# EAGLE board atmega32u4-breakout-v2-panelized (EAGLE 5.10), part 1 of 2
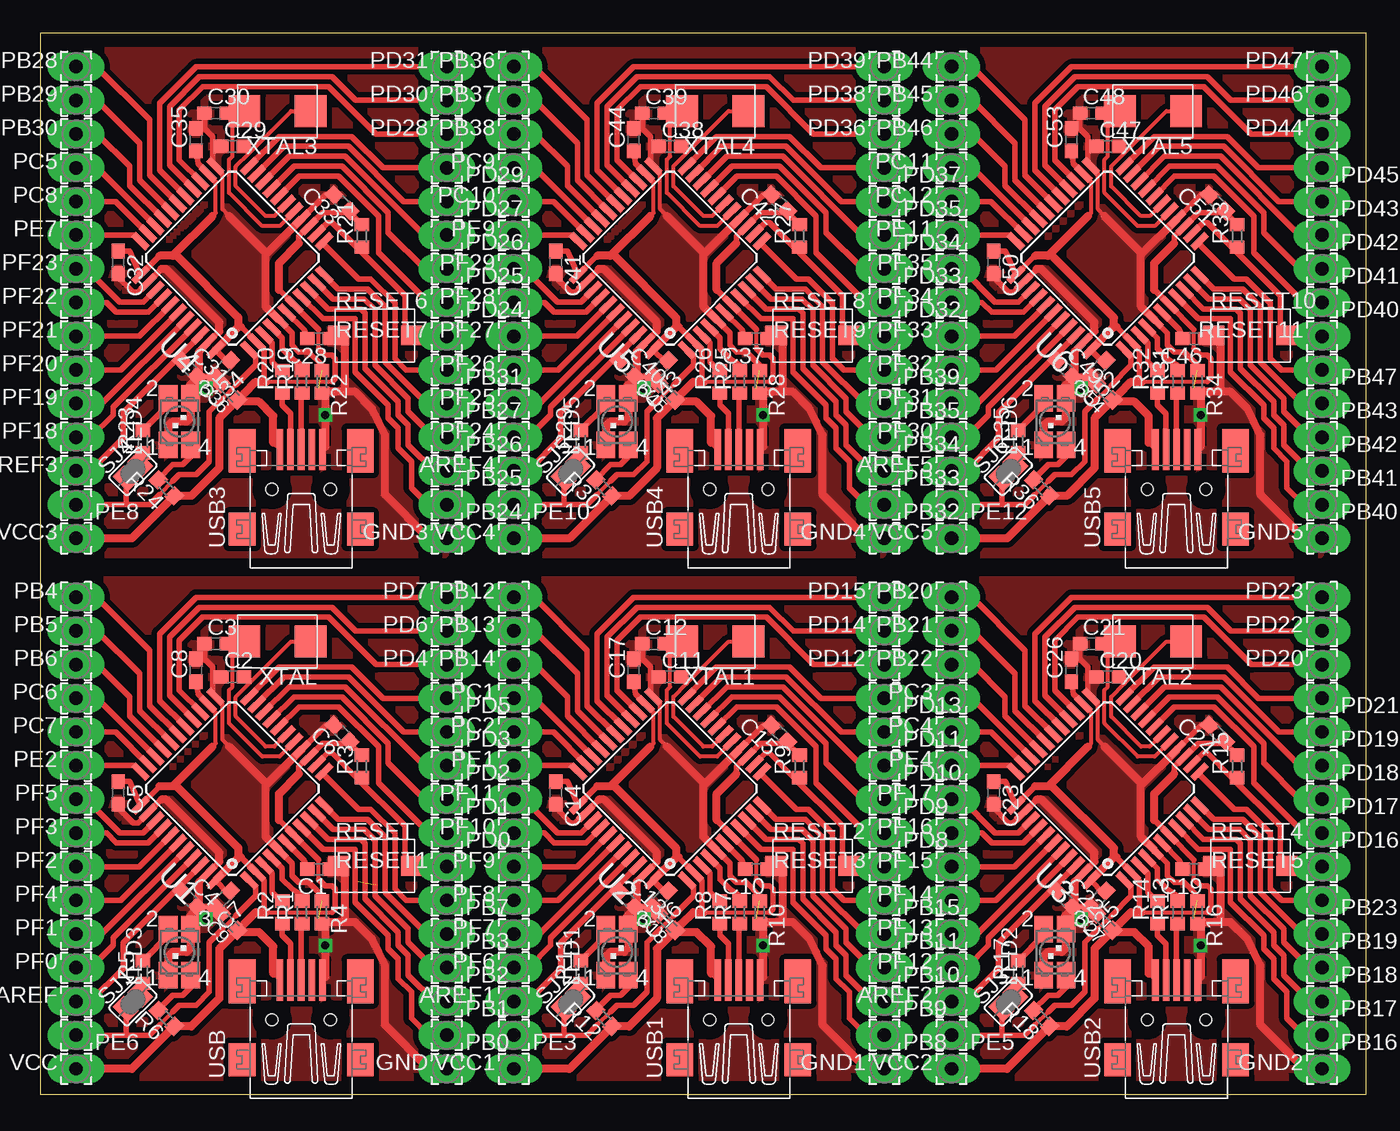
[diagram p0: board, top side]
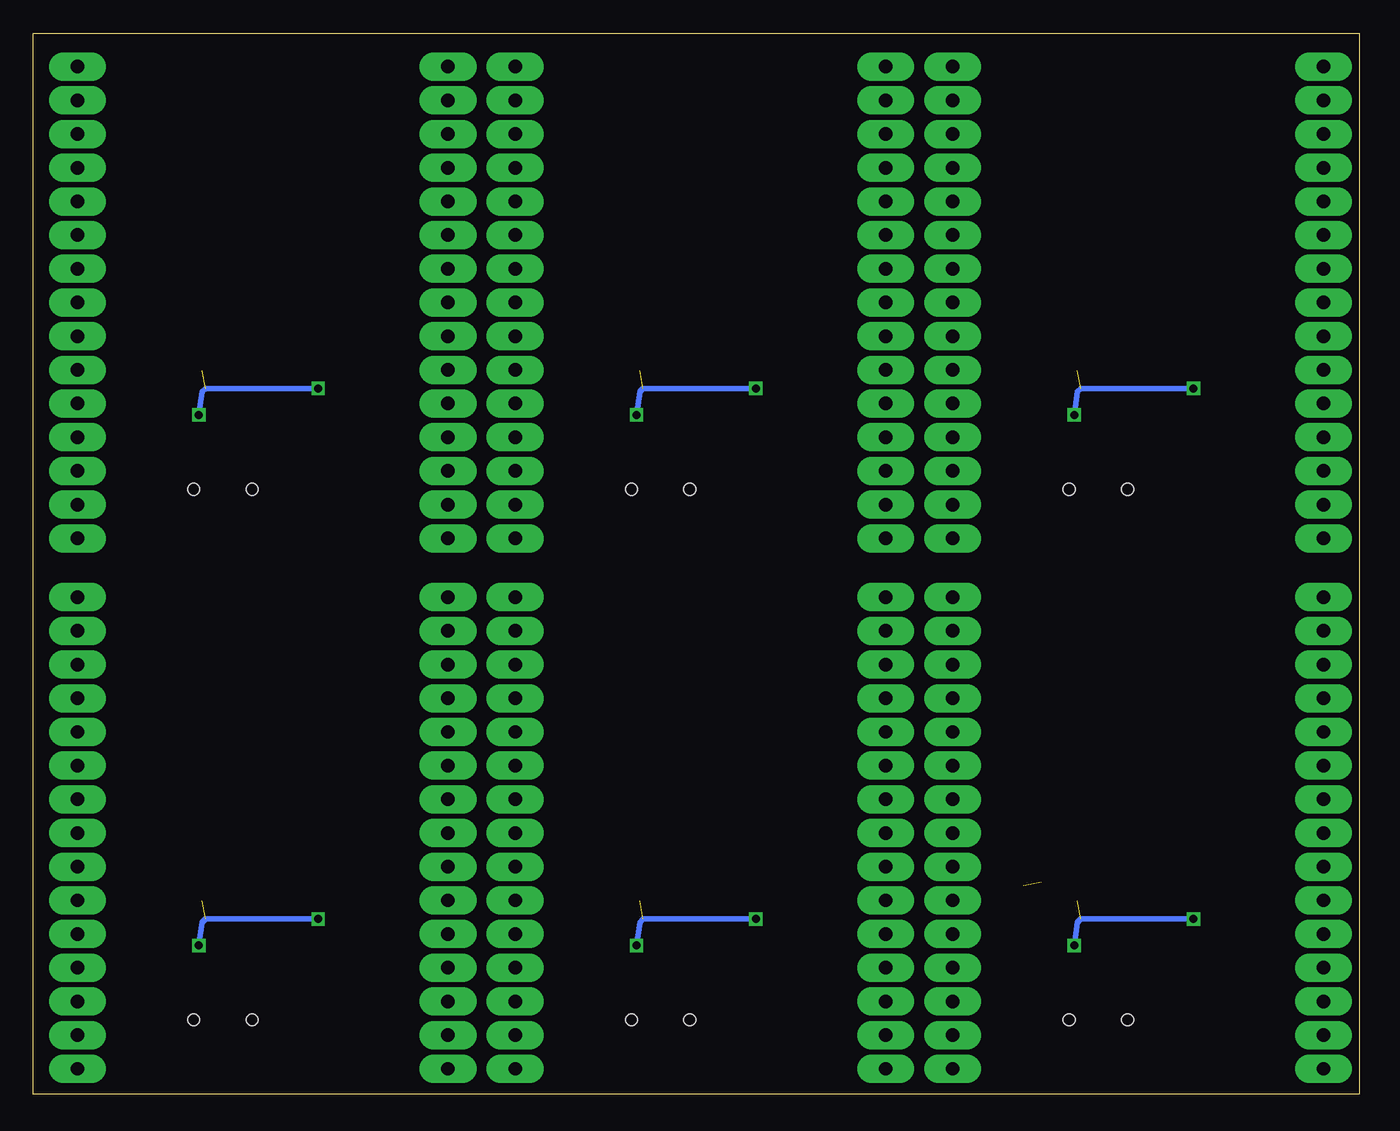
[diagram p1: board, bottom side, seen from below]

Size 100 x 80 mm. Coordinates in mm from the lower left corner, seen from the top.
Outline: 0,0 100,0 100,80 0,80 0,0
Copper layers (1*16): Top 0.035mm / dielectric 1.5mm / Bottom 0.035mm
Design rules "default *": minimum track width 10mil, minimum drill 24mil, track to track 8mil, track to pad 8mil, pad to pad 8mil, via to via 8mil, smd to smd 8mil, copper to edge 40mil, drill to drill 8mil, minimum pad ring 10mil, minimum via ring 8mil, stop-mask expansion 4mil, vias tented up to drill 0mil, thermal gap 16mil

## Footprints (pad centres in the part's own frame; a part is rotated, then mirrored left to right if it is on the bottom)
2,15Y/1,0 = drill 1.016 pad 2.159 long: 1 0,0
C0603 = smd 1.1 x 1: 1 -0.85,0; 2 0.85,0
C0603K = smd 1.05 x 1.08: 1 -0.875,0; 2 0.875,0
P-LCC-4/2 = smd 1.4 x 2: 1 -0.85,-1.75; 2 -0.85,1.75; 3 0.85,1.75; 4 0.85,-1.75
R0603 = smd 1 x 1.1: 1 -0.85,0; 2 0.85,0
SWSMD4X6 = smd 1.6 x 1.5: P$1 -2.75,0; P$2 2.75,0
SJ = smd 1.168 x 1.6: 1 -0.762,0; 2 0.762,0
TQFP44 = smd 1.5 x 0.5: 1 -5.8,4; 2 -5.8,3.2; 3 -5.8,2.4; 4 -5.8,1.6; 5 -5.8,0.8; 6 -5.8,0; 7 -5.8,-0.8; 8 -5.8,-1.6; 9 -5.8,-2.4; 10 -5.8,-3.2; 11 -5.8,-4; 23 5.8,-4; 24 5.8,-3.2; 25 5.8,-2.4; 26 5.8,-1.6; 27 5.8,-0.8; 28 5.8,0; 29 5.8,0.8; 30 5.8,1.6; 31 5.8,2.4; 32 5.8,3.2; 33 5.8,4 | smd 0.5 x 1.5: 12 -4,-5.8; 13 -3.2,-5.8; 14 -2.4,-5.8; 15 -1.6,-5.8; 16 -0.8,-5.8; 17 0,-5.8; 18 0.8,-5.8; 19 1.6,-5.8; 20 2.4,-5.8; 21 3.2,-5.8; 22 4,-5.8; 34 4,5.8; 35 3.2,5.8; 36 2.4,5.8; 37 1.6,5.8; 38 0.8,5.8; 39 0,5.8; 40 -0.8,5.8; 41 -1.6,5.8; 42 -2.4,5.8; 43 -3.2,5.8; 44 -4,5.8
32005-301 = smd 3.1 x 0.5: 1 3,1.6; 2 3,0.8; 3 3,0; 4 3,-0.8; 5 3,-1.6 | smd 2.5 x 2: M1 -3,-4.45; M2 -3,4.45 | smd 3.3 x 2: M3 2.9,4.45; M4 2.9,-4.45 | drill 0.127 pad 0.508 round: P$1 0,2.21; P$2 0,-2.21 | hole 0.9: 0,2.2; 0,-2.2
CS10 = smd 2.4 x 2.4: P$1 -2.5,0; P$2 2.5,0

## Placement (x,y rotation side)
AREF  WIREPAD2,15Y/1,0  [2,15Y/1,0]  2.72,6.99 180 top
AREF1  WIREPAD2,15Y/1,0  [2,15Y/1,0]  35.72,6.99 180 top
AREF2  WIREPAD2,15Y/1,0  [2,15Y/1,0]  68.72,6.99 180 top
AREF3  WIREPAD2,15Y/1,0  [2,15Y/1,0]  2.72,46.99 180 top
AREF4  WIREPAD2,15Y/1,0  [2,15Y/1,0]  35.72,46.99 180 top
AREF5  WIREPAD2,15Y/1,0  [2,15Y/1,0]  68.72,46.99 180 top
C1  1u  [C0603]  21.01,16.96 180 top
C2  18p  [C0603]  14.51,31.46 0 top
C3  18p  [C0603]  13.26,33.96 0 top
C4  100n  [C0603]  11.26,14.71 315 top
C5  100n  [C0603]  5.89,22.71 270 top
C6  100n  [C0603]  22.76,27.21 135 top
C7  100n  [C0603]  13.76,14.71 225 top
C8  100n  [C0603]  11.76,31.96 90 top
C9  1u  [C0603K]  14.26,12.96 135 top
C10  1u  [C0603]  54.01,16.96 180 top
C11  18p  [C0603]  47.51,31.46 0 top
C12  18p  [C0603]  46.26,33.96 0 top
C13  100n  [C0603]  44.26,14.71 315 top
C14  100n  [C0603]  38.89,22.71 270 top
C15  100n  [C0603]  55.76,27.21 135 top
C16  100n  [C0603]  46.76,14.71 225 top
C17  100n  [C0603]  44.76,31.96 90 top
C18  1u  [C0603K]  47.26,12.96 135 top
C19  1u  [C0603]  87.01,16.96 180 top
C20  18p  [C0603]  80.51,31.46 0 top
C21  18p  [C0603]  79.26,33.96 0 top
C22  100n  [C0603]  77.26,14.71 315 top
C23  100n  [C0603]  71.89,22.71 270 top
C24  100n  [C0603]  88.76,27.21 135 top
C25  100n  [C0603]  79.76,14.71 225 top
C26  100n  [C0603]  77.76,31.96 90 top
C27  1u  [C0603K]  80.26,12.96 135 top
C28  1u  [C0603]  21.01,56.96 180 top
C29  18p  [C0603]  14.51,71.46 0 top
C30  18p  [C0603]  13.26,73.96 0 top
C31  100n  [C0603]  11.26,54.71 315 top
C32  100n  [C0603]  5.89,62.72 270 top
C33  100n  [C0603]  22.76,67.21 135 top
C34  100n  [C0603]  13.76,54.71 225 top
C35  100n  [C0603]  11.76,71.96 90 top
C36  1u  [C0603K]  14.26,52.96 135 top
C37  1u  [C0603]  54.01,56.96 180 top
C38  18p  [C0603]  47.51,71.46 0 top
C39  18p  [C0603]  46.26,73.96 0 top
C40  100n  [C0603]  44.26,54.71 315 top
C41  100n  [C0603]  38.89,62.72 270 top
C42  100n  [C0603]  55.76,67.21 135 top
C43  100n  [C0603]  46.76,54.71 225 top
C44  100n  [C0603]  44.76,71.96 90 top
C45  1u  [C0603K]  47.26,52.96 135 top
C46  1u  [C0603]  87.01,56.96 180 top
C47  18p  [C0603]  80.51,71.46 0 top
C48  18p  [C0603]  79.26,73.96 0 top
C49  100n  [C0603]  77.26,54.71 315 top
C50  100n  [C0603]  71.89,62.72 270 top
C51  100n  [C0603]  88.76,67.21 135 top
C52  100n  [C0603]  79.76,54.71 225 top
C53  100n  [C0603]  77.76,71.96 90 top
C54  1u  [C0603K]  80.26,52.96 135 top
GND  WIREPAD2,15Y/1,0  [2,15Y/1,0]  30.66,1.91 180 top
GND1  WIREPAD2,15Y/1,0  [2,15Y/1,0]  63.66,1.91 180 top
GND2  WIREPAD2,15Y/1,0  [2,15Y/1,0]  96.66,1.91 180 top
GND3  WIREPAD2,15Y/1,0  [2,15Y/1,0]  30.66,41.91 180 top
GND4  WIREPAD2,15Y/1,0  [2,15Y/1,0]  63.66,41.91 180 top
GND5  WIREPAD2,15Y/1,0  [2,15Y/1,0]  96.66,41.91 180 top
LED1  [P-LCC-4/2]  43.51,10.71 0 top
LED2  [P-LCC-4/2]  76.51,10.71 0 top
LED3  [P-LCC-4/2]  10.51,10.71 0 top
LED4  [P-LCC-4/2]  10.51,50.71 0 top
LED5  [P-LCC-4/2]  43.51,50.71 0 top
LED6  [P-LCC-4/2]  76.51,50.71 0 top
PB0  WIREPAD2,15Y/1,0  [2,15Y/1,0]  30.66,4.45 0 top
PB1  WIREPAD2,15Y/1,0  [2,15Y/1,0]  30.66,6.99 0 top
PB2  WIREPAD2,15Y/1,0  [2,15Y/1,0]  30.66,9.53 0 top
PB3  WIREPAD2,15Y/1,0  [2,15Y/1,0]  30.66,12.07 0 top
PB4  WIREPAD2,15Y/1,0  [2,15Y/1,0]  2.72,37.47 180 top
PB5  WIREPAD2,15Y/1,0  [2,15Y/1,0]  2.72,34.93 180 top
PB6  WIREPAD2,15Y/1,0  [2,15Y/1,0]  2.72,32.39 180 top
PB7  WIREPAD2,15Y/1,0  [2,15Y/1,0]  30.66,14.61 0 top
PB8  WIREPAD2,15Y/1,0  [2,15Y/1,0]  63.66,4.45 0 top
PB9  WIREPAD2,15Y/1,0  [2,15Y/1,0]  63.66,6.99 0 top
PB10  WIREPAD2,15Y/1,0  [2,15Y/1,0]  63.66,9.53 0 top
PB11  WIREPAD2,15Y/1,0  [2,15Y/1,0]  63.66,12.07 0 top
PB12  WIREPAD2,15Y/1,0  [2,15Y/1,0]  35.72,37.47 180 top
PB13  WIREPAD2,15Y/1,0  [2,15Y/1,0]  35.72,34.93 180 top
PB14  WIREPAD2,15Y/1,0  [2,15Y/1,0]  35.72,32.39 180 top
PB15  WIREPAD2,15Y/1,0  [2,15Y/1,0]  63.66,14.61 0 top
PB16  WIREPAD2,15Y/1,0  [2,15Y/1,0]  96.66,4.45 0 top
PB17  WIREPAD2,15Y/1,0  [2,15Y/1,0]  96.66,6.99 0 top
PB18  WIREPAD2,15Y/1,0  [2,15Y/1,0]  96.66,9.53 0 top
PB19  WIREPAD2,15Y/1,0  [2,15Y/1,0]  96.66,12.07 0 top
PB20  WIREPAD2,15Y/1,0  [2,15Y/1,0]  68.72,37.47 180 top
PB21  WIREPAD2,15Y/1,0  [2,15Y/1,0]  68.72,34.93 180 top
PB22  WIREPAD2,15Y/1,0  [2,15Y/1,0]  68.72,32.39 180 top
PB23  WIREPAD2,15Y/1,0  [2,15Y/1,0]  96.66,14.61 0 top
PB24  WIREPAD2,15Y/1,0  [2,15Y/1,0]  30.66,44.45 0 top
PB25  WIREPAD2,15Y/1,0  [2,15Y/1,0]  30.66,46.99 0 top
PB26  WIREPAD2,15Y/1,0  [2,15Y/1,0]  30.66,49.53 0 top
PB27  WIREPAD2,15Y/1,0  [2,15Y/1,0]  30.66,52.07 0 top
PB28  WIREPAD2,15Y/1,0  [2,15Y/1,0]  2.72,77.47 180 top
PB29  WIREPAD2,15Y/1,0  [2,15Y/1,0]  2.72,74.93 180 top
PB30  WIREPAD2,15Y/1,0  [2,15Y/1,0]  2.72,72.39 180 top
PB31  WIREPAD2,15Y/1,0  [2,15Y/1,0]  30.66,54.61 0 top
PB32  WIREPAD2,15Y/1,0  [2,15Y/1,0]  63.66,44.45 0 top
PB33  WIREPAD2,15Y/1,0  [2,15Y/1,0]  63.66,46.99 0 top
PB34  WIREPAD2,15Y/1,0  [2,15Y/1,0]  63.66,49.53 0 top
PB35  WIREPAD2,15Y/1,0  [2,15Y/1,0]  63.66,52.07 0 top
PB36  WIREPAD2,15Y/1,0  [2,15Y/1,0]  35.72,77.47 180 top
PB37  WIREPAD2,15Y/1,0  [2,15Y/1,0]  35.72,74.93 180 top
PB38  WIREPAD2,15Y/1,0  [2,15Y/1,0]  35.72,72.39 180 top
PB39  WIREPAD2,15Y/1,0  [2,15Y/1,0]  63.66,54.61 0 top
PB40  WIREPAD2,15Y/1,0  [2,15Y/1,0]  96.66,44.45 0 top
PB41  WIREPAD2,15Y/1,0  [2,15Y/1,0]  96.66,46.99 0 top
PB42  WIREPAD2,15Y/1,0  [2,15Y/1,0]  96.66,49.53 0 top
PB43  WIREPAD2,15Y/1,0  [2,15Y/1,0]  96.66,52.07 0 top
PB44  WIREPAD2,15Y/1,0  [2,15Y/1,0]  68.72,77.47 180 top
PB45  WIREPAD2,15Y/1,0  [2,15Y/1,0]  68.72,74.93 180 top
PB46  WIREPAD2,15Y/1,0  [2,15Y/1,0]  68.72,72.39 180 top
PB47  WIREPAD2,15Y/1,0  [2,15Y/1,0]  96.66,54.61 0 top
PC1  WIREPAD2,15Y/1,0  [2,15Y/1,0]  35.72,29.85 180 top
PC2  WIREPAD2,15Y/1,0  [2,15Y/1,0]  35.72,27.31 180 top
PC3  WIREPAD2,15Y/1,0  [2,15Y/1,0]  68.72,29.85 180 top
PC4  WIREPAD2,15Y/1,0  [2,15Y/1,0]  68.72,27.31 180 top
PC5  WIREPAD2,15Y/1,0  [2,15Y/1,0]  2.72,69.85 180 top
PC6  WIREPAD2,15Y/1,0  [2,15Y/1,0]  2.72,29.85 180 top
PC7  WIREPAD2,15Y/1,0  [2,15Y/1,0]  2.72,27.31 180 top
PC8  WIREPAD2,15Y/1,0  [2,15Y/1,0]  2.72,67.31 180 top
PC9  WIREPAD2,15Y/1,0  [2,15Y/1,0]  35.72,69.85 180 top
PC10  WIREPAD2,15Y/1,0  [2,15Y/1,0]  35.72,67.31 180 top
PC11  WIREPAD2,15Y/1,0  [2,15Y/1,0]  68.72,69.85 180 top
PC12  WIREPAD2,15Y/1,0  [2,15Y/1,0]  68.72,67.31 180 top
PD0  WIREPAD2,15Y/1,0  [2,15Y/1,0]  30.66,19.69 0 top
PD1  WIREPAD2,15Y/1,0  [2,15Y/1,0]  30.66,22.23 0 top
PD2  WIREPAD2,15Y/1,0  [2,15Y/1,0]  30.66,24.77 0 top
PD3  WIREPAD2,15Y/1,0  [2,15Y/1,0]  30.66,27.31 0 top
PD4  WIREPAD2,15Y/1,0  [2,15Y/1,0]  30.66,32.39 180 top
PD5  WIREPAD2,15Y/1,0  [2,15Y/1,0]  30.66,29.85 0 top
PD6  WIREPAD2,15Y/1,0  [2,15Y/1,0]  30.66,34.93 180 top
PD7  WIREPAD2,15Y/1,0  [2,15Y/1,0]  30.66,37.47 180 top
PD8  WIREPAD2,15Y/1,0  [2,15Y/1,0]  63.66,19.69 0 top
PD9  WIREPAD2,15Y/1,0  [2,15Y/1,0]  63.66,22.23 0 top
PD10  WIREPAD2,15Y/1,0  [2,15Y/1,0]  63.66,24.77 0 top
PD11  WIREPAD2,15Y/1,0  [2,15Y/1,0]  63.66,27.31 0 top
PD12  WIREPAD2,15Y/1,0  [2,15Y/1,0]  63.66,32.39 180 top
PD13  WIREPAD2,15Y/1,0  [2,15Y/1,0]  63.66,29.85 0 top
PD14  WIREPAD2,15Y/1,0  [2,15Y/1,0]  63.66,34.93 180 top
PD15  WIREPAD2,15Y/1,0  [2,15Y/1,0]  63.66,37.47 180 top
PD16  WIREPAD2,15Y/1,0  [2,15Y/1,0]  96.66,19.69 0 top
PD17  WIREPAD2,15Y/1,0  [2,15Y/1,0]  96.66,22.23 0 top
PD18  WIREPAD2,15Y/1,0  [2,15Y/1,0]  96.66,24.77 0 top
PD19  WIREPAD2,15Y/1,0  [2,15Y/1,0]  96.66,27.31 0 top
PD20  WIREPAD2,15Y/1,0  [2,15Y/1,0]  96.66,32.39 180 top
PD21  WIREPAD2,15Y/1,0  [2,15Y/1,0]  96.66,29.85 0 top
PD22  WIREPAD2,15Y/1,0  [2,15Y/1,0]  96.66,34.93 180 top
PD23  WIREPAD2,15Y/1,0  [2,15Y/1,0]  96.66,37.47 180 top
PD24  WIREPAD2,15Y/1,0  [2,15Y/1,0]  30.66,59.69 0 top
PD25  WIREPAD2,15Y/1,0  [2,15Y/1,0]  30.66,62.23 0 top
PD26  WIREPAD2,15Y/1,0  [2,15Y/1,0]  30.66,64.77 0 top
PD27  WIREPAD2,15Y/1,0  [2,15Y/1,0]  30.66,67.31 0 top
PD28  WIREPAD2,15Y/1,0  [2,15Y/1,0]  30.66,72.39 180 top
PD29  WIREPAD2,15Y/1,0  [2,15Y/1,0]  30.66,69.85 0 top
PD30  WIREPAD2,15Y/1,0  [2,15Y/1,0]  30.66,74.93 180 top
PD31  WIREPAD2,15Y/1,0  [2,15Y/1,0]  30.66,77.47 180 top
PD32  WIREPAD2,15Y/1,0  [2,15Y/1,0]  63.66,59.69 0 top
PD33  WIREPAD2,15Y/1,0  [2,15Y/1,0]  63.66,62.23 0 top
PD34  WIREPAD2,15Y/1,0  [2,15Y/1,0]  63.66,64.77 0 top
PD35  WIREPAD2,15Y/1,0  [2,15Y/1,0]  63.66,67.31 0 top
PD36  WIREPAD2,15Y/1,0  [2,15Y/1,0]  63.66,72.39 180 top
PD37  WIREPAD2,15Y/1,0  [2,15Y/1,0]  63.66,69.85 0 top
PD38  WIREPAD2,15Y/1,0  [2,15Y/1,0]  63.66,74.93 180 top
PD39  WIREPAD2,15Y/1,0  [2,15Y/1,0]  63.66,77.47 180 top
PD40  WIREPAD2,15Y/1,0  [2,15Y/1,0]  96.66,59.69 0 top
PD41  WIREPAD2,15Y/1,0  [2,15Y/1,0]  96.66,62.23 0 top
PD42  WIREPAD2,15Y/1,0  [2,15Y/1,0]  96.66,64.77 0 top
PD43  WIREPAD2,15Y/1,0  [2,15Y/1,0]  96.66,67.31 0 top
PD44  WIREPAD2,15Y/1,0  [2,15Y/1,0]  96.66,72.39 180 top
PD45  WIREPAD2,15Y/1,0  [2,15Y/1,0]  96.66,69.85 0 top
PD46  WIREPAD2,15Y/1,0  [2,15Y/1,0]  96.66,74.93 180 top
PD47  WIREPAD2,15Y/1,0  [2,15Y/1,0]  96.66,77.47 180 top
PE1  WIREPAD2,15Y/1,0  [2,15Y/1,0]  35.72,24.77 180 top
PE2  WIREPAD2,15Y/1,0  [2,15Y/1,0]  2.72,24.77 180 top
PE3  WIREPAD2,15Y/1,0  [2,15Y/1,0]  35.72,4.45 0 top
PE4  WIREPAD2,15Y/1,0  [2,15Y/1,0]  68.72,24.77 180 top
PE5  WIREPAD2,15Y/1,0  [2,15Y/1,0]  68.72,4.45 0 top
PE6  WIREPAD2,15Y/1,0  [2,15Y/1,0]  2.72,4.45 0 top
PE7  WIREPAD2,15Y/1,0  [2,15Y/1,0]  2.72,64.77 180 top
PE8  WIREPAD2,15Y/1,0  [2,15Y/1,0]  2.72,44.45 0 top
PE9  WIREPAD2,15Y/1,0  [2,15Y/1,0]  35.72,64.77 180 top
PE10  WIREPAD2,15Y/1,0  [2,15Y/1,0]  35.72,44.45 0 top
PE11  WIREPAD2,15Y/1,0  [2,15Y/1,0]  68.72,64.77 180 top
PE12  WIREPAD2,15Y/1,0  [2,15Y/1,0]  68.72,44.45 0 top
PF0  WIREPAD2,15Y/1,0  [2,15Y/1,0]  2.72,9.53 180 top
PF1  WIREPAD2,15Y/1,0  [2,15Y/1,0]  2.72,12.07 180 top
PF2  WIREPAD2,15Y/1,0  [2,15Y/1,0]  2.72,17.15 180 top
PF3  WIREPAD2,15Y/1,0  [2,15Y/1,0]  2.72,19.69 180 top
PF4  WIREPAD2,15Y/1,0  [2,15Y/1,0]  2.72,14.61 180 top
PF5  WIREPAD2,15Y/1,0  [2,15Y/1,0]  2.72,22.23 180 top
PF6  WIREPAD2,15Y/1,0  [2,15Y/1,0]  35.72,9.53 180 top
PF7  WIREPAD2,15Y/1,0  [2,15Y/1,0]  35.72,12.07 180 top
PF8  WIREPAD2,15Y/1,0  [2,15Y/1,0]  35.72,14.61 180 top
PF9  WIREPAD2,15Y/1,0  [2,15Y/1,0]  35.72,17.15 180 top
PF10  WIREPAD2,15Y/1,0  [2,15Y/1,0]  35.72,19.69 180 top
PF11  WIREPAD2,15Y/1,0  [2,15Y/1,0]  35.72,22.23 180 top
PF12  WIREPAD2,15Y/1,0  [2,15Y/1,0]  68.72,9.53 180 top
PF13  WIREPAD2,15Y/1,0  [2,15Y/1,0]  68.72,12.07 180 top
PF14  WIREPAD2,15Y/1,0  [2,15Y/1,0]  68.72,14.61 180 top
PF15  WIREPAD2,15Y/1,0  [2,15Y/1,0]  68.72,17.15 180 top
PF16  WIREPAD2,15Y/1,0  [2,15Y/1,0]  68.72,19.69 180 top
PF17  WIREPAD2,15Y/1,0  [2,15Y/1,0]  68.72,22.23 180 top
PF18  WIREPAD2,15Y/1,0  [2,15Y/1,0]  2.72,49.53 180 top
PF19  WIREPAD2,15Y/1,0  [2,15Y/1,0]  2.72,52.07 180 top
PF20  WIREPAD2,15Y/1,0  [2,15Y/1,0]  2.72,54.61 180 top
PF21  WIREPAD2,15Y/1,0  [2,15Y/1,0]  2.72,57.15 180 top
PF22  WIREPAD2,15Y/1,0  [2,15Y/1,0]  2.72,59.69 180 top
PF23  WIREPAD2,15Y/1,0  [2,15Y/1,0]  2.72,62.23 180 top
PF24  WIREPAD2,15Y/1,0  [2,15Y/1,0]  35.72,49.53 180 top
PF25  WIREPAD2,15Y/1,0  [2,15Y/1,0]  35.72,52.07 180 top
PF26  WIREPAD2,15Y/1,0  [2,15Y/1,0]  35.72,54.61 180 top
PF27  WIREPAD2,15Y/1,0  [2,15Y/1,0]  35.72,57.15 180 top
PF28  WIREPAD2,15Y/1,0  [2,15Y/1,0]  35.72,59.69 180 top
PF29  WIREPAD2,15Y/1,0  [2,15Y/1,0]  35.72,62.23 180 top
PF30  WIREPAD2,15Y/1,0  [2,15Y/1,0]  68.72,49.53 180 top
PF31  WIREPAD2,15Y/1,0  [2,15Y/1,0]  68.72,52.07 180 top
PF32  WIREPAD2,15Y/1,0  [2,15Y/1,0]  68.72,54.61 180 top
PF33  WIREPAD2,15Y/1,0  [2,15Y/1,0]  68.72,57.15 180 top
PF34  WIREPAD2,15Y/1,0  [2,15Y/1,0]  68.72,59.69 180 top
PF35  WIREPAD2,15Y/1,0  [2,15Y/1,0]  68.72,62.23 180 top
R1  22  [R0603]  19.76,13.71 90 top
R2  22  [R0603]  18.26,13.71 90 top
R3  10k  [R0603]  24.26,24.71 90 top
R4  0  [R0603]  21.26,13.71 270 top
R5  180  [R0603]  7.76,9.21 90 top
R6  180  [R0603]  9.51,5.71 135 top
R7  22  [R0603]  52.76,13.71 90 top
R8  22  [R0603]  51.26,13.71 90 top
R9  10k  [R0603]  57.26,24.71 90 top
R10  0  [R0603]  54.26,13.71 270 top
R11  180  [R0603]  40.76,9.21 90 top
R12  180  [R0603]  42.51,5.71 135 top
R13  22  [R0603]  85.76,13.71 90 top
R14  22  [R0603]  84.26,13.71 90 top
R15  10k  [R0603]  90.26,24.71 90 top
R16  0  [R0603]  87.26,13.71 270 top
R17  180  [R0603]  73.76,9.21 90 top
R18  180  [R0603]  75.51,5.71 135 top
R19  22  [R0603]  19.76,53.71 90 top
R20  22  [R0603]  18.26,53.71 90 top
R21  10k  [R0603]  24.26,64.71 90 top
R22  0  [R0603]  21.26,53.71 270 top
R23  180  [R0603]  7.76,49.21 90 top
R24  180  [R0603]  9.51,45.71 135 top
R25  22  [R0603]  52.76,53.71 90 top
R26  22  [R0603]  51.26,53.71 90 top
R27  10k  [R0603]  57.26,64.71 90 top
R28  0  [R0603]  54.26,53.71 270 top
R29  180  [R0603]  40.76,49.21 90 top
R30  180  [R0603]  42.51,45.71 135 top
R31  22  [R0603]  85.76,53.71 90 top
R32  22  [R0603]  84.26,53.71 90 top
R33  10k  [R0603]  90.26,64.71 90 top
R34  0  [R0603]  87.26,53.71 270 top
R35  180  [R0603]  73.76,49.21 90 top
R36  180  [R0603]  75.51,45.71 135 top
RESET  SMDSWITCH4X6  [SWSMD4X6]  25.26,17.21 0 top
RESET1  WIREPAD2,15Y/1,0  [2,15Y/1,0]  30.66,17.15 180 top
RESET2  SMDSWITCH4X6  [SWSMD4X6]  58.26,17.21 0 top
RESET3  WIREPAD2,15Y/1,0  [2,15Y/1,0]  63.66,17.15 180 top
RESET4  SMDSWITCH4X6  [SWSMD4X6]  91.26,17.21 0 top
RESET5  WIREPAD2,15Y/1,0  [2,15Y/1,0]  96.66,17.15 180 top
RESET6  SMDSWITCH4X6  [SWSMD4X6]  25.26,57.21 0 top
RESET7  WIREPAD2,15Y/1,0  [2,15Y/1,0]  30.66,57.15 180 top
RESET8  SMDSWITCH4X6  [SWSMD4X6]  58.26,57.21 0 top
RESET9  WIREPAD2,15Y/1,0  [2,15Y/1,0]  63.66,57.15 180 top
RESET10  SMDSWITCH4X6  [SWSMD4X6]  91.26,57.21 0 top
RESET11  WIREPAD2,15Y/1,0  [2,15Y/1,0]  96.66,57.15 180 top
SJ1  [SJ]  7.01,6.96 45 top
SJ2  [SJ]  40.01,6.96 45 top
SJ3  [SJ]  73.01,6.96 45 top
SJ4  [SJ]  7.01,46.96 45 top
SJ5  [SJ]  40.01,46.96 45 top
SJ6  [SJ]  73.01,46.96 45 top
U1  ATMEGA32U4  [TQFP44]  14.5,23.04 135 top
U2  ATMEGA32U4  [TQFP44]  47.5,23.04 135 top
U3  ATMEGA32U4  [TQFP44]  80.5,23.04 135 top
U4  ATMEGA32U4  [TQFP44]  14.5,63.04 135 top
U5  ATMEGA32U4  [TQFP44]  47.5,63.04 135 top
U6  ATMEGA32U4  [TQFP44]  80.5,63.04 135 top
USB  MINI-USB-32005-301  [32005-301]  19.69,5.6 90 top
USB1  MINI-USB-32005-301  [32005-301]  52.69,5.6 90 top
USB2  MINI-USB-32005-301  [32005-301]  85.69,5.6 90 top
USB3  MINI-USB-32005-301  [32005-301]  19.69,45.6 90 top
USB4  MINI-USB-32005-301  [32005-301]  52.69,45.6 90 top
USB5  MINI-USB-32005-301  [32005-301]  85.69,45.6 90 top
VCC  WIREPAD2,15Y/1,0  [2,15Y/1,0]  2.72,1.91 180 top
VCC1  WIREPAD2,15Y/1,0  [2,15Y/1,0]  35.72,1.91 180 top
VCC2  WIREPAD2,15Y/1,0  [2,15Y/1,0]  68.72,1.91 180 top
VCC3  WIREPAD2,15Y/1,0  [2,15Y/1,0]  2.72,41.91 180 top
VCC4  WIREPAD2,15Y/1,0  [2,15Y/1,0]  35.72,41.91 180 top
VCC5  WIREPAD2,15Y/1,0  [2,15Y/1,0]  68.72,41.91 180 top
XTAL  16MHz  [CS10]  17.91,34.12 180 top
XTAL1  16MHz  [CS10]  50.91,34.12 180 top
XTAL2  16MHz  [CS10]  83.91,34.12 180 top
XTAL3  16MHz  [CS10]  17.91,74.12 180 top
XTAL4  16MHz  [CS10]  50.91,74.12 180 top
XTAL5  16MHz  [CS10]  83.91,74.12 180 top

## Library data of the parts
AREF AREF1-AREF5 GND GND1-GND5 LED1-LED6 PB0 PB1-PB47 PC1-PC12 PD0 PD1-PD47 PE1-PE12 PF0 PF1-PF35 RESET RESET1-RESET11 U1-U6 USB USB1-USB5 VCC VCC1-VCC5 XTAL XTAL1-XTAL5 = jocki
C1-C54 R1-R36 = rcl
SJ1-SJ6 = jumper

## Nets
!RESET: R3.1 RESET1.1 RESET.P$2 U1.13
!RESET1: R9.1 RESET2.P$2 RESET3.1 U2.13
!RESET2: R15.1 RESET4.P$2 RESET5.1 U3.13
!RESET3: R21.1 RESET6.P$2 RESET7.1 U4.13
!RESET4: R27.1 RESET8.P$2 RESET9.1 U5.13
!RESET5: R33.1 RESET10.P$2 RESET11.1 U6.13
AREF: AREF.1 C4.1 U1.42
AREF1: AREF1.1 C13.1 U2.42
AREF2: AREF2.1 C22.1 U3.42
AREF3: AREF3.1 C31.1 U4.42
AREF4: AREF4.1 C40.1 U5.42
AREF5: AREF5.1 C49.1 U6.42
GND: C1.1 C2.1 C3.1 C4.2 C5.2 C6.2 C7.2 C8.2 C9.2 GND.1 LED3.1 LED3.3 R4.1 R4.2 RESET.P$1 U1.5 U1.15 U1.23 U1.35 U1.43 USB.5
GND1: C10.1 C11.1 C12.1 C13.2 C14.2 C15.2 C16.2 C17.2 C18.2 GND1.1 LED1.1 LED1.3 R10.1 R10.2 RESET2.P$1 U2.5 U2.15 U2.23 U2.35 U2.43 USB1.5
GND2: C19.1 C20.1 C21.1 C22.2 C23.2 C24.2 C25.2 C26.2 C27.2 GND2.1 LED2.1 LED2.3 R16.1 R16.2 RESET4.P$1 U3.5 U3.15 U3.23 U3.35 U3.43 USB2.5
GND3: C28.1 C29.1 C30.1 C31.2 C32.2 C33.2 C34.2 C35.2 C36.2 GND3.1 LED4.1 LED4.3 R22.1 R22.2 RESET6.P$1 U4.5 U4.15 U4.23 U4.35 U4.43 USB3.5
GND4: C37.1 C38.1 C39.1 C40.2 C41.2 C42.2 C43.2 C44.2 C45.2 GND4.1 LED5.1 LED5.3 R28.1 R28.2 RESET8.P$1 U5.5 U5.15 U5.23 U5.35 U5.43 USB4.5
GND5: C46.1 C47.1 C48.1 C49.2 C50.2 C51.2 C52.2 C53.2 C54.2 GND5.1 LED6.1 LED6.3 R34.1 R34.2 RESET10.P$1 U6.5 U6.15 U6.23 U6.35 U6.43 USB5.5
LED: PE6.1 SJ1.1 U1.1
LED1: PE3.1 SJ2.1 U2.1
LED2: PE5.1 SJ3.1 U3.1
LED3: PE8.1 SJ4.1 U4.1
LED4: PE10.1 SJ5.1 U5.1
LED5: PE12.1 SJ6.1 U6.1
MISO: PB3.1 U1.11
MISO1: PB11.1 U2.11
MISO2: PB19.1 U3.11
MISO3: PB27.1 U4.11
MISO4: PB35.1 U5.11
MISO5: PB43.1 U6.11
MOSI: PB2.1 U1.10
MOSI1: PB10.1 U2.10
MOSI2: PB18.1 U3.10
MOSI3: PB26.1 U4.10
MOSI4: PB34.1 U5.10
MOSI5: PB42.1 U6.10
N$1: R1.1 USB.3
N$2: R2.1 USB.2
N$3: PB0.1 U1.8
N$4: R5.1 SJ1.2
N$5: C2.2 U1.17 XTAL.P$1
N$6: C3.2 U1.16 XTAL.P$2
N$7: C1.2 U1.6
N$8: LED3.2 R5.2
N$9: R1.2 U1.4
N$10: R2.2 U1.3
N$11: LED3.4 R6.2
N$12: PD5.1 U1.22
N$13: PB4.1 U1.28
N$14: PB5.1 U1.29
N$15: PF0.1 U1.41
N$16: PF1.1 U1.40
N$17: PF4.1 U1.39
N$18: PF2.1 U1.38
N$19: PF3.1 U1.37
N$20: PF5.1 U1.36
N$21: PE2.1 U1.33
N$22: C10.2 U2.6
N$23: PC6.1 U1.31
N$24: PC7.1 U1.32
N$25: PB6.1 U1.30
N$26: PB7.1 U1.12
N$27: PD0.1 U1.18
N$28: PD1.1 U1.19
N$29: PD2.1 U1.20
N$30: PD3.1 U1.21
N$31: PD4.1 U1.25
N$32: R7.2 U2.4
N$33: PD6.1 U1.26
N$34: PD7.1 U1.27
N$35: R8.2 U2.3
N$36: R7.1 USB1.3
N$37: R8.1 USB1.2
N$38: C11.2 U2.17 XTAL1.P$1
N$39: C12.2 U2.16 XTAL1.P$2
N$40: PF6.1 U2.41
N$41: PF7.1 U2.40
N$42: PF8.1 U2.39
N$43: PF9.1 U2.38
N$44: PF10.1 U2.37
N$45: PF11.1 U2.36
N$46: PE1.1 U2.33
N$47: PC1.1 U2.31
N$48: PC2.1 U2.32
N$49: PB8.1 U2.8
N$50: PB12.1 U2.28
N$51: PB13.1 U2.29
N$52: PB14.1 U2.30
N$53: PB15.1 U2.12
N$54: PD8.1 U2.18
N$55: PD9.1 U2.19
N$56: PD10.1 U2.20
N$57: PD11.1 U2.21
N$58: PD12.1 U2.25
N$59: PD14.1 U2.26
N$60: PD15.1 U2.27
N$61: R11.1 SJ2.2
N$62: PD13.1 U2.22
N$63: LED1.2 R11.2
N$64: LED1.4 R12.2
N$65: C19.2 U3.6
N$66: R13.2 U3.4
N$67: R14.2 U3.3
N$68: R13.1 USB2.3
N$69: R14.1 USB2.2
N$70: C20.2 U3.17 XTAL2.P$1
N$71: C21.2 U3.16 XTAL2.P$2
N$72: PF12.1 U3.41
N$73: PF13.1 U3.40
N$74: PF14.1 U3.39
N$75: PF15.1 U3.38
N$76: PF16.1 U3.37
N$77: PF17.1 U3.36
N$78: PE4.1 U3.33
N$79: PC3.1 U3.31
N$80: PC4.1 U3.32
N$81: PB16.1 U3.8
N$82: PB20.1 U3.28
N$83: PB21.1 U3.29
N$84: PB22.1 U3.30
N$85: PB23.1 U3.12
N$86: PD16.1 U3.18
N$87: PD17.1 U3.19
N$88: PD18.1 U3.20
N$89: PD19.1 U3.21
N$90: PD20.1 U3.25
N$91: PD22.1 U3.26
N$92: PD23.1 U3.27
N$93: R17.1 SJ3.2
N$94: PD21.1 U3.22
N$95: LED2.2 R17.2
N$96: LED2.4 R18.2
N$97: C28.2 U4.6
N$98: R19.2 U4.4
N$99: R20.2 U4.3
N$100: R19.1 USB3.3
N$101: R20.1 USB3.2
N$102: C29.2 U4.17 XTAL3.P$1
N$103: C30.2 U4.16 XTAL3.P$2
N$104: PF18.1 U4.41
N$105: PF19.1 U4.40
N$106: PF20.1 U4.39
N$107: PF21.1 U4.38
N$108: PF22.1 U4.37
N$109: PF23.1 U4.36
N$110: PE7.1 U4.33
N$111: PC5.1 U4.31
N$112: PC8.1 U4.32
N$113: PB24.1 U4.8
N$114: PB28.1 U4.28
N$115: PB29.1 U4.29
N$116: PB30.1 U4.30
N$117: PB31.1 U4.12
N$118: PD24.1 U4.18
N$119: PD25.1 U4.19
N$120: PD26.1 U4.20
N$121: PD27.1 U4.21
N$122: PD28.1 U4.25
N$123: PD30.1 U4.26
N$124: PD31.1 U4.27
N$125: R23.1 SJ4.2
N$126: PD29.1 U4.22
N$127: LED4.2 R23.2
N$128: LED4.4 R24.2
N$129: C37.2 U5.6
N$130: R25.2 U5.4
N$131: R26.2 U5.3
N$132: R25.1 USB4.3
N$133: R26.1 USB4.2
N$134: C38.2 U5.17 XTAL4.P$1
N$135: C39.2 U5.16 XTAL4.P$2
N$136: PF24.1 U5.41
N$137: PF25.1 U5.40
N$138: PF26.1 U5.39
N$139: PF27.1 U5.38
N$140: PF28.1 U5.37
N$141: PF29.1 U5.36
N$142: PE9.1 U5.33
N$143: PC9.1 U5.31
N$144: PC10.1 U5.32
N$145: PB32.1 U5.8
N$146: PB36.1 U5.28
N$147: PB37.1 U5.29
N$148: PB38.1 U5.30
N$149: PB39.1 U5.12
N$150: PD32.1 U5.18
N$151: PD33.1 U5.19
N$152: PD34.1 U5.20
N$153: PD35.1 U5.21
N$154: PD36.1 U5.25
N$155: PD38.1 U5.26
N$156: PD39.1 U5.27
N$157: R29.1 SJ5.2
N$158: PD37.1 U5.22
N$159: LED5.2 R29.2
N$160: LED5.4 R30.2
N$161: C46.2 U6.6
N$162: R31.2 U6.4
N$163: R32.2 U6.3
N$164: R31.1 USB5.3
N$165: R32.1 USB5.2
N$166: C47.2 U6.17 XTAL5.P$1
N$167: C48.2 U6.16 XTAL5.P$2
N$168: PF30.1 U6.41
N$169: PF31.1 U6.40
N$170: PF32.1 U6.39
N$171: PF33.1 U6.38
N$172: PF34.1 U6.37
N$173: PF35.1 U6.36
N$174: PE11.1 U6.33
N$175: PC11.1 U6.31
N$176: PC12.1 U6.32
N$177: PB40.1 U6.8
N$178: PB44.1 U6.28
N$179: PB45.1 U6.29
N$180: PB46.1 U6.30
N$181: PB47.1 U6.12
N$182: PD40.1 U6.18
N$183: PD41.1 U6.19
N$184: PD42.1 U6.20
N$185: PD43.1 U6.21
N$186: PD44.1 U6.25
N$187: PD46.1 U6.26
N$188: PD47.1 U6.27
N$189: R35.1 SJ6.2
N$190: PD45.1 U6.22
N$191: LED6.2 R35.2
N$192: LED6.4 R36.2
SCK: PB1.1 U1.9
SCK1: PB9.1 U2.9
SCK2: PB17.1 U3.9
SCK3: PB25.1 U4.9
SCK4: PB33.1 U5.9
SCK5: PB41.1 U6.9
VCC: C5.1 C6.1 C7.1 C8.1 C9.1 R3.2 R6.1 U1.2 U1.7 U1.14 U1.24 U1.34 U1.44 USB.1 VCC.1
VCC1: C14.1 C15.1 C16.1 C17.1 C18.1 R9.2 R12.1 U2.2 U2.7 U2.14 U2.24 U2.34 U2.44 USB1.1 VCC1.1
VCC2: C23.1 C24.1 C25.1 C26.1 C27.1 R15.2 R18.1 U3.2 U3.7 U3.14 U3.24 U3.34 U3.44 USB2.1 VCC2.1
VCC3: C32.1 C33.1 C34.1 C35.1 C36.1 R21.2 R24.1 U4.2 U4.7 U4.14 U4.24 U4.34 U4.44 USB3.1 VCC3.1
VCC4: C41.1 C42.1 C43.1 C44.1 C45.1 R27.2 R30.1 U5.2 U5.7 U5.14 U5.24 U5.34 U5.44 USB4.1 VCC4.1
VCC5: C50.1 C51.1 C52.1 C53.1 C54.1 R33.2 R36.1 U6.2 U6.7 U6.14 U6.24 U6.34 U6.44 USB5.1 VCC5.1